# Altium PCB PCB1.PcbDoc
Units mm, origin at the board's own origin, x right, y up, seen from the top; angles counter-clockwise.
Board outline 40 x 28 mm, 2 copper layers (Top Layer, Bottom Layer); 60 components, 39 nets, 216 pads, 82 vias.
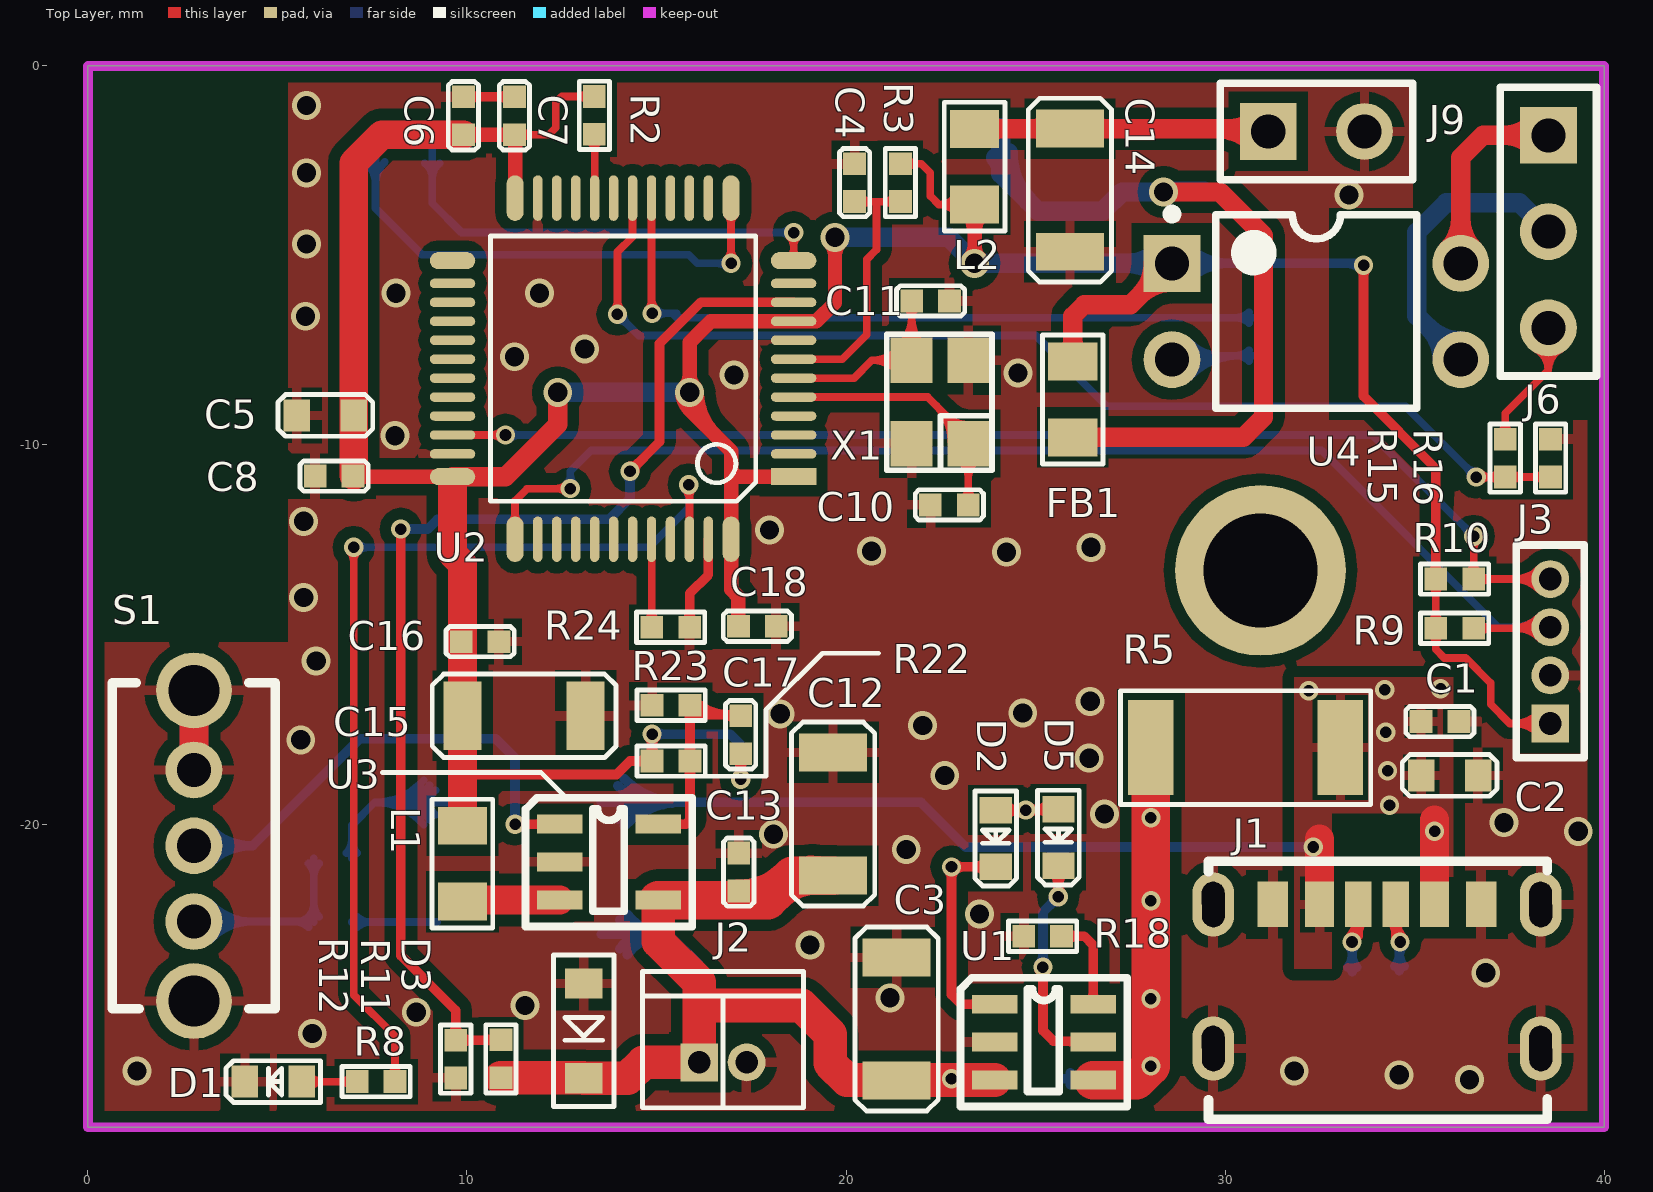
[diagram p0: Top Layer view]
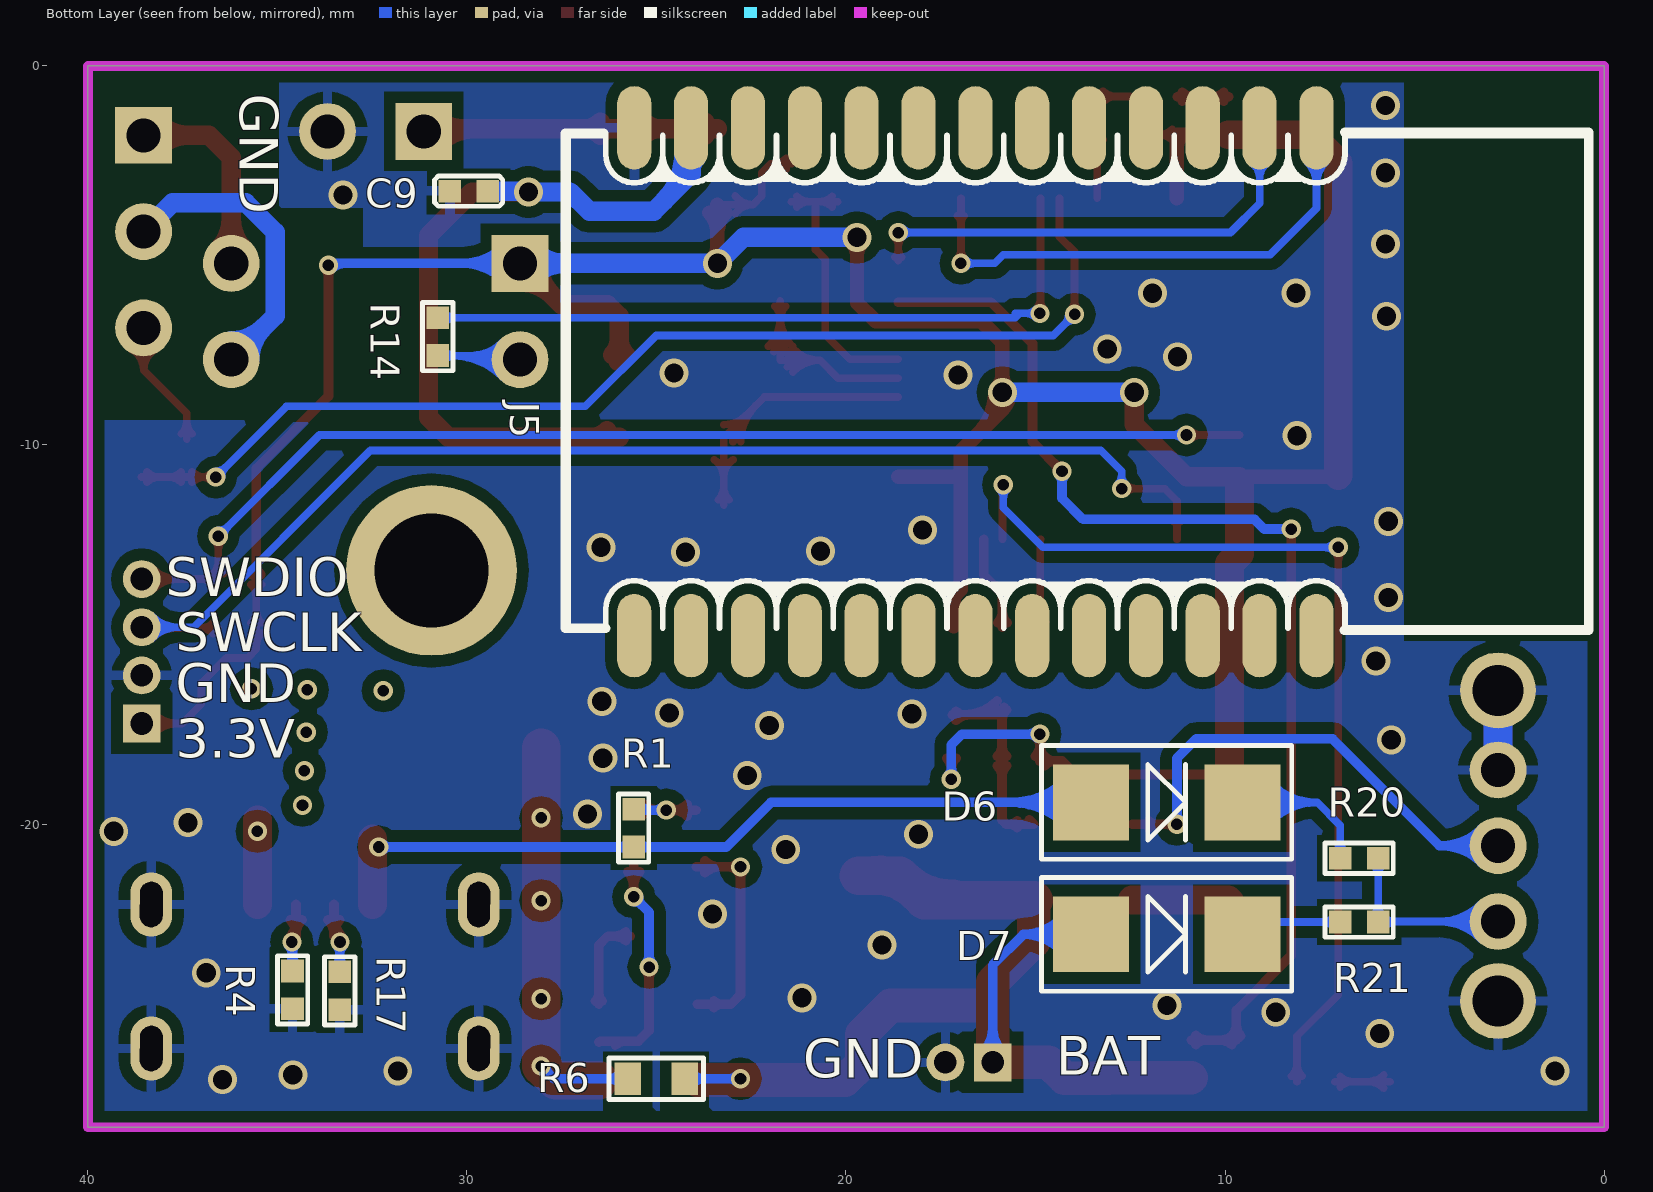
[diagram p1: Bottom Layer view, seen from below]

## Layer stack, top to bottom
Top Layer: signal copper 0.0356
Dielectric: dielectric 0.32, FR-4, Dk 4.8
Bottom Layer: signal copper 0.0356

## Board outline
0,-28 40,-28 40,0 0,0

## Design rules (kind name [scope] priority, off if disabled: settings)
Clearance [All] p1: gap=0.127
HoleSize [All] p1: absolutevalues=TRUE maxlimit=12.7 minlimit=0.025 maxpercent=80.000 minpercent=20.000
MinimumSolderMaskSliver [All] p1: minsoldermaskwidth=0.025
PolygonConnect gnd [IsVia] p1: connectstyle=Direct reliefconductorwidth=0.254 reliefentries=4 polygonreliefangle="90 Angle"
PolygonConnect [All] p2: connectstyle=Relief reliefconductorwidth=0.254 reliefentries=4 polygonreliefangle="90 Angle"
RoutingVias [All] p1: holewidth=0.711 width=1.27 viastyle="Through Hole" minholewidth=0.711 minwidth=1.27 maxholewidth=0.711 maxwidth=1.27
SilkToSilkClearance [All] p1: silktosilkclearance=0.025
SilkscreenOverComponentPads [All] p1: minsilkscreentomaskgap=0
SolderMaskExpansion [All] p1: expansion=0.102
Width [All] p1: maxlimit=5.08 minlimit=0.127 preferedwidth=0.254
24 further rules are at their usual default settings.

## Classes and differential pairs
component class power: C1 C2 C3 C12 C13 C14 C15 C16 C17 D2 D3 D5 D6 D7 J1 J2 J9 L1 L2 R1 R4 R5 R6 R17 R18 R20 R21 R22 R23 S1 S3 U1 U3
component class mcu: C4 C5 C6 C7 C8 C9 C10 C11 C18 D1 FB1 J3 J5 J6 R2 R3 R8 R9 R10 R11 R12 R14 R15 R16 R24 U2 U4 X1

## Components (designator, comment, footprint, x,y, rotation, side; value= is the part's Value field where it differs from the comment)
C1 "0.1uF/10V" 0402C 36.171,-17.297 r180 top
C2 "10uF/10V" 0603C 36.679,-18.72 r180 top
C3 "22uF/10V" 1206C 21.336,-26.772 r90 top
C4 "0.1uF/10V" 0402C 20.225,-2.578 r270 top
C5 "10uF/10V" 0603C 5.512,-9.22 r0 top
C6 "0.1uF/10V" 0402C 9.906,-0.813 r270 top
C7 "0.1uF/10V" 0402C 11.252,-0.813 r270 top
C8 "0.1uF/10V" 0402C 5.994,-10.82 r0 top
C9 "0.1uF/10V" 0402C 30.455,-3.302 r180 bottom
C10 "22P" 0402C 22.225,-11.582 r0 top
C11 "22P" 0402C 22.733,-6.198 r180 top
C12 "100uF/10v" 1206C 19.66,-21.361 r90 top
C13 "0.1uF/10V" 0402c 17.17,-21.768 r90 top
C14 "100uF/10v" 1206C 25.908,-1.651 r270 top
C15 "100uF/10V" 1206C 13.132,-17.145 r180 top
C16 "0.1uF/10V" 0402C 10.846,-15.189 r180 top
C17 "5pF/10V" 0402C 17.221,-17.145 r270 top
C18 "0.1uF/10V" 0402C 18.161,-14.783 r180 top
D1 "" 0603LED 5.639,-26.797 r180 top
D2 "" 0603LED 23.952,-19.633 r270 top
D3 "MM3Z5V1" SOD323 13.081,-24.206 r270 top
D5 "" 0603LED 25.603,-19.607 r270 top
D6 "SS14" SMA 13.538,-19.431 r180 bottom
D7 "SS14" SMA 13.538,-22.911 r180 bottom
FB1 "FB" 0805CZ 25.984,-7.798 r270 top
J1 "TYPE C_6P" TYPEC_6P 34.011,-22.123 r0 top
J2 "Header 2" 2X1.25MMZ 16.129,-26.289 r0 top
J3 "Header 4" mHDR1X4 38.583,-17.348 r90 top
J5 "HC-08" HC-08V20/22/41 16.586,-8.331 r180 bottom
J6 "Header 3" HDR1X3 38.532,-1.829 r270 top
J9 "Header 2" HDR1X2 31.14,-1.727 r0 top
L1 "4.7uH" 0805r 9.881,-22.047 r90 top
L2 "4.7uH" 0805r 23.393,-3.658 r90 top
R1 "1K" 0402R 25.603,-19.607 r270 bottom
R2 "100K" 0402R 13.36,-1.803 r90 top
R3 "10K" 0402R 21.438,-2.578 r270 top
R4 "5.1K" 0402R 34.601,-23.876 r270 bottom
R5 "0.4/3/4W" 2010R 33.045,-17.983 r180 top
R6 "5K" 0603R 24.257,-26.721 r0 bottom
R8 "1K" 0402R 8.103,-26.797 r180 top
R9 "10K" 0402R 35.56,-14.834 r0 top
R10 "10K" 0402R 35.56,-13.538 r0 top
R11 "10K/1%" 0402R 10.897,-26.695 r90 top
R12 "10K/1%" 0402R 9.703,-25.705 r270 top
R14 "120" 0402R 30.771,-6.641 r270 bottom
R15 "10K" 0402R 37.395,-10.846 r90 top
R16 "10K" 0402R 38.589,-9.846 r270 top
R17 "5.1K" 0402R 33.357,-23.901 r270 bottom
R18 "3K/1%" 0402R 24.689,-22.962 r0 top
R20 "10K" 0402R 6.96,-20.904 r180 bottom
R21 "10K" 0402R 6.96,-22.587 r180 bottom
R22 "24K/1%" 0402R 15.884,-18.339 r180 top
R23 "5.1K/1%" 0402R 14.884,-16.866 r0 top
R24 "100K" 0402R 15.875,-14.808 r180 top
S1 "SK-12D07-VG4" SK-12D07-VG4 2.794,-20.574 r270 top
U1 "TP4059" sot-23-6 25.222,-25.756 r0 top
U2 "STM32F103C8T6" TQFP-48 18.618,-10.236 r180 top
U3 "PAM2312" SOT-23-5 13.746,-21.006 r0 top
U4 "PC817B" DIP-4 32.41,-6.477 r0 top
X1 "8M" XTAL4TN_3225 22.479,-8.865 r90 top

## Footprints (in the part's own frame and the unit in brackets; to place one, negate y for a bottom-side part, rotate by r counter-clockwise, add the part's x,y. Pads: shape width x height; smd on the part's side, far side on the other; paste and mask are expansions set on the pad)
2X1.25MMZ [mm]
  rect 1x1 hole 0.6: 1(0,0)
  round 1 hole 0.6: 2(1.25,0)
  silkscreen extent -1.5,-1.2 2.75,2.4
0402C [mm]
  rect 0.6x0.6 smd: 1(0,0) 2(1,0)
  silkscreen extent -0.4,-0.4 1.4,0.4
0402c [mm]
  rect 0.6x0.6 smd: 1(0,0) 2(1,0)
  silkscreen extent -0.4,-0.4 1.4,0.4
0402R [mm]
  rect 0.6x0.6 smd: 1(0,0) 2(1,0)
  silkscreen extent -0.4,-0.4 1.4,0.4
0603C [mm]
  rect 0.7x0.85 smd: 1(0,0) 2(1.5,0)
  silkscreen extent -0.5,-0.55 2,0.55
0603LED [mm]
  rect 0.7x0.85 smd: 1(0,0) 2(1.5,0)
  silkscreen extent -0.5,-0.55 2,0.55
0603R [mm]
  rect 0.7x0.85 smd: 1(0,0) 2(1.5,0)
  silkscreen extent -0.5,-0.55 2,0.55
0805CZ [mm]
  rect 1x1.3 smd: 1(0,0) 2(2,0)
  silkscreen extent -0.7,-0.8 2.7,0.8
0805r [mm]
  rect 1x1.3 smd: 1(0,0) 2(2,0)
  silkscreen extent -0.7,-0.8 2.7,0.8
1206C [mm]
  rect 1x1.8 smd: 1(0,0) 2(3.25,0)
  silkscreen extent -0.8,-1.1 4.05,1.1
2010R [mm]
  rect 1.2x2.5 smd: 1(0,0) 2(5,0)
  silkscreen extent -0.8,-1.5 5.8,1.5
DIP-4 [mm] "DIP; 4 Leads; Row Spacing 7.62 mm; Pitch 2.54 mm"
  rect 1.5x1.5 hole 0.9: 1(-3.81,1.27)
  round 1.5 hole 0.9: 2(-3.81,-1.27) 3(3.81,-1.27) 4(3.81,1.27)
  silkscreen extent -3.93,-2.55 2.65,2.69, body extent -3.15,-2.5 3.15,2.5, height 5.6
HC-08V20/22/41 [mm]
  oval 0.9x2.2 smd: 1(9,6.7) 2(7.5,6.7) 3(6,6.7) 4(4.5,6.7) 5(3,6.7) 6(1.5,6.7) 7(0,6.7) 8(-1.5,6.7) 9(-3,6.7) 10(-4.5,6.7) 11(-6,6.7) 12(-7.5,6.7) 13(-9,6.7) 14(-9,-6.7) 15(-7.5,-6.7) 16(-6,-6.7) 17(-4.5,-6.7) 18(-3,-6.7) 19(-1.5,-6.7) 20(0,-6.7) 21(1.5,-6.7) 22(3,-6.7) 23(4.5,-6.7) 24(6,-6.7) 25(7.5,-6.7) 26(9,-6.7)
  silkscreen extent -10.82,-6.55 16.18,6.58
HDR1X2 [mm] "Connector; Header; 2 Position"
  rect 1.5x1.5 hole 0.9: 1(0,0)
  round 1.5 hole 0.9: 2(2.54,0)
  silkscreen extent -1.27,-1.27 3.81,1.27
HDR1X3 [mm] "Connector; Header; 3 Position"
  rect 1.5x1.5 hole 0.9: 1(0,0)
  round 1.5 hole 0.9: 2(2.54,0) 3(5.08,0)
  silkscreen extent -1.27,-1.27 6.35,1.27
mHDR1X4 [mm] "Connector; Header; 4 Position"
  rect 1x1 hole 0.6: 1(0,0)
  round 1 hole 0.6: 2(1.27,0) 3(2.54,0) 4(3.81,0)
  silkscreen extent -0.9,-0.9 4.71,0.9
SK-12D07-VG4 [mm]
  round 1.5 hole 0.9: 1(-2,0) 2(0,0) 3(2,0)
  round 2 hole 1.35: 4(-4.1,0) 5(4.1,0)
  silkscreen extent -4.3,-2.15 4.3,2.15
SMA [mm]
  rect 2x2 smd: 1(0,0) 2(4,0)
  silkscreen extent -1.3,-1.5 5.3,1.5
SOD323 [mm]
  rect 0.8x1 smd: 1(0,0) 2(2.5,0)
  silkscreen extent -0.75,-0.8 3.25,0.8
SOT-23-5 [mm]
  rect 1.2x0.5 smd: 1(-1.3,1) 2(-1.3,0) 3(-1.3,-1) 4(1.3,-1) 5(1.3,1)
  silkscreen extent -2.2,-1.7 2.2,1.7
sot-23-6 [mm]
  rect 1.2x0.5 smd: 1(-1.3,1) 2(-1.3,0) 3(-1.3,-1) 4(1.3,-1) 5(1.3,0) 6(1.3,1)
  silkscreen extent -2.2,-1.7 2.2,1.7
TQFP-48 [mm]
  rect 1.2x0.45 smd: 1(0,0.6)
  oval 1.2x0.25 smd: 2(0,0) 3(0,-0.5) 4(0,-1) 5(0,-1.5) 6(0,-2) 7(0,-2.5) 8(0,-3) 9(0,-3.5) 10(0,-4) 11(0,-4.5) 26(9,-4.5) 27(9,-4) 28(9,-3.5) 29(9,-3) 30(9,-2.5) 31(9,-2) 32(9,-1.5) 33(9,-1) 34(9,-0.5) 35(9,0)
  oval 1.2x0.45 smd: 12(0,-5.1) 25(9,-5.1) 36(9,0.6)
  oval 0.45x1.2 smd: 13(1.65,-6.75) 24(7.35,-6.75) 37(7.35,2.25) 48(1.65,2.25)
  oval 0.25x1.2 smd: 14(2.25,-6.75) 15(2.75,-6.75) 16(3.25,-6.75) 17(3.75,-6.75) 18(4.25,-6.75) 19(4.75,-6.75) 20(5.25,-6.75) 21(5.75,-6.75) 22(6.25,-6.75) 23(6.75,-6.75) 38(6.75,2.25) 39(6.25,2.25) 40(5.75,2.25) 41(5.25,2.25) 42(4.75,2.25) 43(4.25,2.25) 44(3.75,2.25) 45(3.25,2.25) 46(2.75,2.25) 47(2.25,2.25)
  silkscreen extent 1,-5.75 8,1.25
TYPEC_6P [mm]
  oval 1.1x1.7 hole 0.6 slot 1.2 at 90.6 deg: 1(-4.32,-3.8) 1(-4.32,0) 1(4.32,-3.8) 1(4.32,0)
  rect 0.7x1.2 smd: A5(-0.5,0) B5(0.5,0)
  rect 0.76x1.2 smd: A9(1.52,0) B9(-1.52,0)
  rect 0.8x1.2 smd: A12(2.75,0) B12(-2.75,0)
  silkscreen extent -4.44,-5.66 4.49,1.14
XTAL4TN_3225 [mm]
  rect 1.2x1.1 smd: 1(-1.1,-0.75) 2(1.1,-0.75) 3(1.1,0.75) 4(-1.1,0.75)
  silkscreen extent -1.8,-1.38 1.79,1.4

## Part data
C1 C2 C3 C4 C5 C6 C7 C8 C9 C10 C11 C12 C13 C14 C15 C16 C17 C18: library part Cap, "Capacitor"
D1 D2 D5: library part LED0, "Typical INFRARED GaAs LED"
D3: library part "D Tunnel1", "Tunnel Diode - RLC Model"
D6 D7: library part Diode, "Default Diode"
FB1: "BLM21PG331SN1D"
J2 J9: "Header, 2-Pin"
J3: "Header, 4-Pin"
J5: library part "Header 13X2", "Header, 13-Pin, Dual row"
J6: "Header, 3-Pin"
L1 L2: library part Inductor, "Inductor"
R1 R3 R4 R5 R6 R8 R9 R10 R11 R12 R14 R15 R16 R17 R18 R20 R21 R22 R23: library part "Res Semi", "Semiconductor Resistor"
R2 R24: library part Res1, "Resistor"
S1: library part SW-SPDT, "SPDT Subminiature Toggle Switch, Right Angle Mounting, Vertical Actuation"
U2: library part STM32F103C6
U4: library part Optoisolator1, "4-Pin Phototransistor Optocoupler"
X1: library part CRYSTAL-4

## Free pads (board coordinates)
  round 4.5 hole 3: 0(30.937,-13.31)

## Via types
v1: diameter 0.762, hole 0.508, Top Layer to Bottom Layer, tented both sides, 47 vias
v2: diameter 0.508, hole 0.305, Top Layer to Bottom Layer, tented both sides, 35 vias

## Nets (pads, with @x,y where several pads share a name; then routed paths per layer and width w, separated by ;. In a path a pad name is that pad's centre, name@x,y a point inside that pad or via, vN(x,y) a via of type N, cw(c..) or ccw(c..) an arc to the next point about the centre after c; other vN are vias at no path point)
AD_BAT_IN: R11.2 R12.1 U2.10 | length 33.1
  Top Layer w0.254: v2(8.255,-12.217) 8.255,-23.47 9.703,-24.917 R12.1 ; R12.1@9.58,-25.582 ccw(c9.285,-25.287) 9.703,-25.287 ccw(c10.12,-25.287) 9.825,-25.582 ccw(c10.12,-25.287) 10.12,-25.705 ccw(c10.12,-26.122) R12.1@9.825,-25.827 ; R12.1@9.601,-25.603 R12.1 ; 10.456,-25.705 ccw(c10.456,-25.255) R11.2@10.774,-25.573 ; 10.502,-25.705 cw(c10.502,-26.09) R11.2@10.774,-25.818 ; R11.2@10.887,-25.705 R12.1 ; v2(14.3,-10.693) 15.079,-9.914 15.079,-7.324 16.167,-6.236 U2.10 ; v2@14.3,-10.566 ccw(c14.3,-10.26) 14.517,-10.477 ccw(c14.734,-10.693) v2@14.427,-10.693
  Bottom Layer w0.254: v2(8.255,-12.217) 8.966,-12.217 9.22,-11.963 13.742,-11.963 14.3,-11.405 v2@14.3,-10.752 ; v2@14.21,-10.783 cw(c13.994,-11) 14.3,-11 cw(c14.607,-11) v2@14.39,-10.783
BATTERY: C3.1 C12.1 C13.1 D3.2 D7.1 J2.1 R6.1 R11.1 U1.3 U3.4 | length 42
  Top Layer w0.889: R11.1 D3.2@13.07,-26.695 ; D3.2 14.237,-26.706 14.654,-26.289 J2.1 16.129,-24.74 ; U3.4 15.046,-23.098 16.129,-24.181 16.129,-24.74 ; U1.3 20.025,-26.756 19.583,-26.314 19.583,-25.546 18.828,-24.79 16.18,-24.79 16.129,-24.74
  Top Layer w1.016: U3.4 17.069,-22.006 17.941,-22.006 18.585,-21.361 C12.1 ; C13.1@17.17,-21.976 ccw(c17.17,-20.044) 18.536,-21.41 ; 18.122,-21.825 cw(c19.26,-22.963) C12.1@19.26,-21.353 ; 18.248,-21.699 cw(c19.105,-22.556) C12.1@19.261,-21.353
  Bottom Layer w0.254: D7.1 15.316,-22.911 ; D7.1@14.028,-23.289 cw(c14.799,-23.885) 14.799,-22.911 cw(c14.799,-21.937) D7.1@14.028,-22.532 ; D7.1@14.229,-23.445 cw(c15.316,-24.285) 15.316,-22.911 ; D7.1@14.229,-22.377 ccw(c15.316,-21.537) 15.316,-22.911 ; J2.1@15.865,-26.025 ccw(c15.229,-25.389) 16.129,-25.389 ccw(c17.029,-25.389) J2.1@16.393,-26.025 ; J2.1 16.129,-23.724 15.316,-22.911 ; v2(22.784,-26.721) R6.1 ; v2@22.874,-26.811 cw(c23.09,-27.027) 23.09,-26.721 cw(c23.09,-26.414) v2@22.874,-26.631 ; R6.1@24.099,-26.878 ccw(c23.719,-27.259) 23.719,-26.721 ccw(c23.719,-26.182) R6.1@24.099,-26.563
DM: U2.32
DP: U2.33
GND: C1.1 C2.1 C3.2 C4.1 C5.1 C6.1 C7.1 C8.1 C9.1 C10.1 C11.1 C12.2 C13.2 C14.2 C15.1 C16.1 C18.1 D1.2 D3.1 J1.1 J1.A12 J1.B12 J2.2 J3.2 J5.13 J9.2 R4.2 R12.2 R16.1 R17.2 R18.1 R23.1 R24.1 S1.1 S1.4 S1.5 U1.2 U2.8 U2.23 U2.35 U2.47 U3.2 X1.2 X1.4 | length 10
  Top Layer w0.254: C6.1 C7.1 ; C6.1@10.028,-0.935 cw(c10.324,-1.23) 10.324,-0.813 cw(c10.324,-0.395) C6.1@10.028,-0.69 ; C7.1@11.13,-0.935 ccw(c10.835,-1.23) 10.835,-0.813 ccw(c10.835,-0.395) C7.1@11.13,-0.69 ; R24.1@15.753,-14.686 ccw(c15.457,-14.391) 15.875,-14.391 ccw(c16.293,-14.391) R24.1@15.997,-14.686 ; R24.1 15.875,-13.917 16.368,-13.424 U2.47
  Top Layer w0.762: S1.1 S1.4
  Bottom Layer w0.762: S1.1 S1.4
  other v1: 36.449,-26.746 34.595,-26.619 1.295,-26.518 31.826,-26.518 5.918,-25.527 8.661,-24.968 11.532,-24.79 21.158,-24.587 36.881,-23.927 19.05,-23.19 23.52,-22.377 21.59,-20.676 18.085,-20.269 39.319,-20.193 37.363,-19.964 26.822,-19.736 22.606,-18.72 26.416,-18.263 5.613,-17.78 22.022,-17.399 18.263,-17.094 24.663,-17.069 26.441,-16.764 6.02,-15.697 5.69,-14.021 24.232,-12.827 20.676,-12.802 26.467,-12.7 17.983,-12.243 5.69,-12.014 8.103,-9.754 17.043,-8.153 24.536,-8.103 11.252,-7.671 13.106,-7.468 5.74,-6.604 8.128,-5.994 11.913,-5.994 5.766,-4.699 33.274,-3.404 5.766,-2.819 5.766,-1.041
LED: D1.1 R8.2 | length 3.2
  Top Layer w0.203: D1.1 R8.2 ; D1.1@5.814,-26.973 cw(c6.238,-27.397) 6.238,-26.797 cw(c6.238,-26.197) D1.1@5.814,-26.621 ; R8.2@6.962,-26.937 ccw(c6.624,-27.276) 6.624,-26.797 ccw(c6.624,-26.318) R8.2@6.962,-26.657
NetC17_1: C17.1 R22.1 R23.2 U3.5 | length 9.8
  Top Layer w0.254: U3.5@15.164,-19.888 U3.5 15.778,-20.006 15.884,-19.899 R22.1 15.884,-17.12 C17.1@17.196,-17.12 ; U3.5@15.483,-20.093 cw(c15.693,-20.303) 15.693,-20.006 cw(c15.693,-19.709) U3.5@15.483,-19.919 ; R22.1@15.762,-18.461 cw(c15.467,-18.756) 15.884,-18.756 cw(c16.302,-18.756) R22.1@16.007,-18.461 ; R22.1@15.762,-18.216 ccw(c15.467,-17.921) 15.884,-17.921 ccw(c16.302,-17.921) R22.1@16.007,-18.216 ; R23.2@15.762,-16.988 cw(c15.467,-17.283) 15.884,-17.283 cw(c16.302,-17.283) R23.2@16.007,-16.988 ; R23.2@15.827,-16.923 ccw(c16.302,-16.448) 16.302,-17.12 ; R23.2@16.007,-16.743 ccw(c16.915,-15.835) 16.915,-17.12 ; 16.742,-17.12 cw(c16.742,-17.624) C17.1@17.099,-17.267 ; 16.865,-17.12 ccw(c16.865,-16.789) C17.1@17.099,-17.023
NetD2_1: D2.1 D5.1 R1.1 | length 6.2
  Top Layer w0.254: D2.1 D5.1@25.578,-19.633 ; D2.1@24.185,-19.79 cw(c24.566,-20.171) 24.566,-19.633 cw(c24.566,-19.094) D2.1@24.185,-19.475 ; v2@24.65,-19.723 ccw(c24.433,-19.939) 24.433,-19.633 ccw(c24.433,-19.326) v2@24.65,-19.543 ; v2@24.829,-19.723 cw(c25.046,-19.939) 25.046,-19.633 cw(c25.046,-19.326) v2@24.829,-19.543 ; v2@24.929,-19.633 ccw(c24.929,-19.008) D5.1@25.371,-19.45 ; 25.051,-19.633 cw(c25.051,-20.084) D5.1@25.371,-19.765
  Bottom Layer w0.254: v2@24.816,-19.633 25.578,-19.633 R1.1 ; v2@24.829,-19.723 cw(c25.046,-19.939) 25.046,-19.633 cw(c25.046,-19.326) v2@24.829,-19.543 ; 25.124,-19.633 ccw(c25.124,-19.128) R1.1@25.481,-19.485 ; 25.247,-19.633 cw(c25.247,-19.964) R1.1@25.481,-19.73
  other v2: 24.74,-19.633
NetD2_2: D2.2 U1.1 | length 8.1
  Top Layer w0.254: v2@22.694,-21.223 cw(c22.477,-21.439) 22.784,-21.439 cw(c23.09,-21.439) 22.874,-21.223 cw(c23.09,-21.439) 23.09,-21.133 cw(c23.09,-20.826) v2@22.874,-21.043 ; U1.1@23.485,-24.843 ccw(c23.275,-25.053) 23.275,-24.756 ccw(c23.275,-24.459) U1.1@23.485,-24.669 ; D2.2@23.72,-21.29 ccw(c23.339,-21.671) 23.339,-21.133 ccw(c23.339,-20.594) D2.2@23.72,-20.975 ; U1.1 23.038,-24.756 22.784,-24.501 v2(22.784,-21.133) D2.2
NetD5_2: D5.2 U1.5 | length 9
  Top Layer w0.254: v2@25.107,-23.864 cw(c24.89,-24.081) 25.197,-24.081 cw(c25.503,-24.081) v2@25.287,-23.864 ; v2(25.197,-23.774) 25.197,-25.451 25.476,-25.73 26.497,-25.73 U1.5 ; D5.2@25.446,-21.265 cw(c25.065,-21.646) 25.603,-21.646 cw(c26.142,-21.646) D5.2@25.761,-21.265 ; v2@25.513,-21.83 ccw(c25.297,-21.614) 25.603,-21.614 ccw(c25.91,-21.614) v2@25.693,-21.83 ; v2(25.603,-21.92) D5.2 ; 25.814,-25.73 cw(c25.814,-26.114) U1.5@26.085,-25.843
  Bottom Layer w0.254: v2@25.107,-23.685 ccw(c24.89,-23.468) 25.197,-23.468 ccw(c25.503,-23.468) v2@25.287,-23.685 ; v2(25.197,-23.774) 25.197,-22.327 v2(25.603,-21.92) ; v2@25.476,-21.92 cw(c25.17,-21.92) 25.386,-22.137 cw(c25.603,-22.354) v2@25.603,-22.047
NetD6_2: D6.2 R20.1 | length 11.2
  Bottom Layer w0.203: R20.1@6.819,-20.764 ccw(c6.481,-20.425) 6.96,-20.425 ccw(c7.439,-20.425) R20.1@7.1,-20.764 ; R20.1 6.96,-20.041 7.569,-19.431 ; D6.2@8.86,-20.02 ccw(c7.569,-21.139) 7.569,-19.431 ; D6.2@8.86,-18.842 cw(c7.569,-17.723) 7.569,-19.431 ; D6.2@9.013,-19.887 ccw(c8.015,-20.753) 8.015,-19.431 ccw(c8.015,-18.109) D6.2@9.013,-18.975 ; D6.2@9.167,-19.753 ccw(c8.46,-20.367) 8.46,-19.431 ccw(c8.46,-18.495) D6.2@9.167,-19.109 ; D6.2 7.569,-19.431
NetD7_2: D7.2 R21.1 | length 3
  Bottom Layer w0.203: R21.1 D7.2@9.214,-22.587 ; R21.1@7.1,-22.727 cw(c7.439,-23.066) 7.439,-22.587 cw(c7.439,-22.108) R21.1@7.1,-22.447
NetJ1_A5: J1.A5 R17.1 | length 4.5
  Top Layer w0.254: v2@33.26,-23.024 ccw(c32.656,-22.42) J1.A5@33.511,-22.42 ; v2(33.35,-23.114) 33.511,-22.954 J1.A5 ; J1.A5@33.353,-22.531 cw(c32.972,-22.912) 33.511,-22.912 cw(c34.049,-22.912) J1.A5@33.668,-22.531
  Bottom Layer w0.254: R17.1@33.234,-23.779 ccw(c32.939,-23.484) 33.357,-23.484 ccw(c33.774,-23.484) R17.1@33.479,-23.779 ; v2@33.26,-23.204 cw(c33.028,-23.436) 33.357,-23.436 ; R17.1 v2@33.357,-23.12 ; 33.357,-23.405 cw(c33.641,-23.405) v2@33.44,-23.204
NetJ1_B5: J1.B5 R4.1 | length 4.3
  Top Layer w0.254: J1.B5@34.353,-22.531 cw(c33.972,-22.912) 34.511,-22.912 cw(c35.049,-22.912) J1.B5@34.668,-22.531 ; J1.B5@34.511,-22.543 ccw(c35.191,-22.543) v2@34.71,-23.024 ; J1.B5 34.511,-23.004 v2(34.62,-23.114)
  Bottom Layer w0.254: R4.1@34.479,-23.754 ccw(c34.184,-23.458) 34.601,-23.458 ccw(c35.019,-23.458) R4.1@34.724,-23.754 ; v2@34.53,-23.204 cw(c34.359,-23.375) 34.601,-23.375 ; R4.1 v2@34.601,-23.133 ; 34.601,-23.466 cw(c34.973,-23.466) v2@34.71,-23.204
NetJ6_1: J6.1 U4.4 | length 9.1
  Top Layer w0.508: U4.4@35.87,-4.856 ccw(c35.023,-4.01) 36.22,-4.01 ccw(c37.418,-4.01) U4.4@36.571,-4.856 ; U4.4 36.22,-2.413 36.805,-1.829 J6.1 ; J6.1@38.181,-2.18 ccw(c37.334,-3.026) 37.334,-1.829 ccw(c37.334,-0.631) J6.1@38.181,-1.478
NetJ6_2: J6.2 U4.3 | length 10
  Top Layer w0.508: U4.3 U4.3@36.22,-7.621
  Bottom Layer w0.508: U4.3@35.724,-7.747 ccw(c34.527,-7.747) 35.374,-6.9 ccw(c36.22,-6.054) U4.3@36.22,-7.251 ; U4.3 35.06,-6.587 35.06,-4.386 35.839,-3.607 37.77,-3.607 J6.2
NetJ6_3: J6.3 R15.2 | length 6.4
  Top Layer w0.203: R15.2@37.255,-9.706 ccw(c36.916,-9.367) 37.395,-9.367 ccw(c37.874,-9.367) R15.2@37.535,-9.706 ; R15.2 37.395,-9.163 38.532,-8.026 ; J6.3@38.21,-7.472 cw(c37.893,-8.026) 38.532,-8.026 ; J6.3@38.311,-7.295 cw(c38.093,-7.676) 38.532,-7.676 cw(c38.97,-7.676) J6.3@38.753,-7.295 ; J6.3 38.532,-8.026 ; J6.3@38.854,-7.472 ccw(c39.171,-8.026) 38.532,-8.026
NetL1_1: L1.1 U3.3 | length 2.6
  Top Layer w0.762: L1.1 9.922,-22.006 U3.3
NetR2_1: R2.1 U2.20 | length 2.4
  Top Layer w0.203: R2.1@13.22,-1.944 cw(c12.863,-2.301) 13.368,-2.301 ; U2.20 R2.1@13.368,-1.811 ; 13.368,-2.264 cw(c13.821,-2.264) R2.1@13.501,-1.944
NetR5_2: R5.2 R6.2 U1.4 | length 13.8
  Top Layer w1.016: U1.4@26.522,-26.768 27.665,-26.768 v2(28.045,-26.387) R5.2
  Bottom Layer w0.254: R6.2 27.711,-26.721 v2(28.045,-26.387) ; R6.2@25.915,-26.878 cw(c26.295,-27.259) 26.295,-26.721 cw(c26.295,-26.182) R6.2@25.915,-26.563 ; v2@27.918,-26.387 cw(c27.612,-26.387) 27.829,-26.604 cw(c28.045,-26.82) v2@28.045,-26.514
  other v2: 28.045,-24.613 28.045,-22.022 28.045,-19.837
NetR8_1: R8.1 U2.46 | length 28.9
  Top Layer w0.203: v2@6.903,-12.808 cw(c6.642,-13.068) 7.01,-13.068 cw(c7.378,-13.068) v2@7.118,-12.808 ; v2(7.01,-12.7) 7.01,-24.511 8.103,-25.603 R8.1 ; R8.1@7.962,-26.657 ccw(c7.624,-26.318) 8.103,-26.318 ccw(c8.582,-26.318) R8.1@8.243,-26.657 ; v2@15.742,-11.157 cw(c15.437,-11.462) 15.868,-11.462 ; U2.46 v2@15.868,-11.068 ; 15.868,-11.372 cw(c16.173,-11.372) v2@15.957,-11.157
  Bottom Layer w0.203: v2(7.01,-12.7) 14.732,-12.7 14.808,-12.7 15.85,-11.659 v2(15.85,-11.049) ; v2@7.118,-12.808 cw(c7.378,-13.068) 7.378,-12.7 cw(c7.378,-12.332) v2@7.118,-12.592 ; v2@15.742,-11.157 cw(c15.482,-11.417) 15.85,-11.417 cw(c16.218,-11.417) v2@15.957,-11.157
NetR14_2: R14.2 U4.2 | length 7.7
  Bottom Layer w0.203: U4.2@28.706,-7.641 R14.2 ; U4.2@28.772,-7.918 cw(c29.44,-8.586) 29.44,-7.641 ; U4.2@28.915,-8.062 cw(c29.93,-9.077) 29.93,-7.641 ; U4.2@28.915,-7.432 ccw(c29.42,-6.927) 29.42,-7.641 ; U4.2@29.059,-8.205 cw(c30.421,-9.567) 30.421,-7.641 ; U4.2@29.059,-7.289 ccw(c29.911,-6.437) 29.911,-7.641 ; R14.2@30.631,-7.782 ccw(c30.292,-8.12) 30.292,-7.641 ccw(c30.292,-7.162) R14.2@30.631,-7.501
NetR18_2: R18.2 U1.6 | length 3.6
  Top Layer w0.254: R18.2 26.289,-22.962 26.522,-23.195 U1.6 ; R18.2@25.811,-23.084 cw(c26.106,-23.379) 26.106,-22.962 cw(c26.106,-22.544) R18.2@25.811,-22.839 ; U1.6@26.435,-24.669 ccw(c26.225,-24.459) 26.522,-24.459 ccw(c26.819,-24.459) U1.6@26.609,-24.669
NetR20_2: R20.2 R21.2 S1.3 | length 11.2
  Bottom Layer w0.203: S1.3 R21.2@5.947,-22.574 ; S1.3@3.109,-22.889 cw(c3.869,-23.649) 3.869,-22.574 cw(c3.869,-21.499) S1.3@3.109,-22.259 ; S1.3@3.252,-23.032 cw(c4.359,-24.139) 4.359,-22.574 cw(c4.359,-21.009) S1.3@3.252,-22.116 ; 5.449,-22.574 cw(c5.449,-23.097) R21.2@5.819,-22.727 ; 5.512,-22.574 ccw(c5.512,-22.139) 5.819,-22.447 ccw(c5.481,-22.108) 5.96,-22.108 ccw(c6.439,-22.108) R21.2@6.1,-22.447 ; R20.2@5.819,-21.044 cw(c5.481,-21.383) 5.96,-21.383 cw(c6.439,-21.383) R20.2@6.1,-21.044 ; R21.2 R20.2
NetR24_2: R24.2 U2.44 | length 3.1
  Top Layer w0.203: R24.2@14.735,-14.668 ccw(c14.396,-14.329) 14.875,-14.329 ccw(c15.354,-14.329) R24.2@15.015,-14.668 ; U2.44 14.875,-12.493 R24.2
NetS1_2: S1.2 U3.1 | length 18
  Top Layer w0.254: v2(11.268,-20.006) U3.1 ; v2@11.358,-20.096 cw(c11.575,-20.312) 11.575,-20.006 cw(c11.575,-19.699) v2@11.358,-19.916 ; U3.1@12.009,-20.093 ccw(c11.799,-20.303) 11.799,-20.006 ccw(c11.799,-19.709) U3.1@12.009,-19.919
  Bottom Layer w0.254: S1.2 4.343,-20.574 7.163,-17.755 10.76,-17.755 11.268,-18.263 v2(11.268,-20.006) ; S1.2@3.055,-20.835 cw(c3.685,-21.465) 3.685,-20.574 cw(c3.685,-19.683) S1.2@3.055,-20.313 ; S1.2@3.235,-21.015 cw(c4.298,-22.078) 4.298,-20.574 cw(c4.298,-19.07) S1.2@3.235,-20.133 ; v2@11.178,-19.916 ccw(c10.962,-19.699) 11.268,-19.699 ccw(c11.575,-19.699) v2@11.358,-19.916
NRST: C4.2 R3.2 U2.7 | length 8.5
  Top Layer w0.203: U2.7 19.899,-7.736 20.549,-7.087 20.549,-5.105 20.803,-4.851 20.803,-3.578 ; C4.2 20.803,-3.578 ; C4.2@20.365,-3.718 cw(c20.704,-4.057) 20.704,-3.578 cw(c20.704,-3.099) C4.2@20.365,-3.438 ; R3.2@21.297,-3.718 ccw(c20.959,-4.057) 20.959,-3.578 ccw(c20.959,-3.099) R3.2@21.297,-3.438 ; R3.2 20.803,-3.578
OSCIN: C10.2 U2.5 X1.1 | length 11.1
  Top Layer w0.203: U2.5 22.153,-8.736 23.229,-9.812 X1.1 23.229,-10.858 ; 22.391,-8.973 cw(c21.45,-9.915) X1.1@22.781,-9.915 ; 22.639,-9.222 ccw(c23.229,-8.632) X1.1@23.229,-9.466 ; 22.738,-9.32 cw(c22.143,-9.915) X1.1@22.984,-9.915 ; X1.1@22.978,-10.386 cw(c22.66,-10.858) 23.229,-10.858 ; C10.2@23.085,-11.442 ccw(c22.736,-11.094) 23.229,-11.094 ; C10.2@23.229,-11.582 23.229,-10.858 ; 23.229,-11.113 ccw(c23.694,-11.113) C10.2@23.365,-11.442 ; X1.1@23.48,-10.386 ccw(c23.798,-10.858) 23.229,-10.858
OSCOUT: C11.2 U2.6 X1.3 | length 10.8
  Top Layer w0.203: U2.6 20.212,-8.236 20.683,-7.765 ; X1.3@21.404,-8.074 ccw(c20.683,-8.759) 20.683,-7.765 ; X1.3@21.404,-7.456 cw(c20.683,-6.77) 20.683,-7.765 ; X1.3@21.412,-7.398 ccw(c20.637,-6.622) 21.733,-6.622 ; X1.3@21.551,-7.934 ccw(c21.157,-8.309) 21.157,-7.765 ccw(c21.157,-7.221) X1.3@21.551,-7.596 ; X1.3@21.556,-7.541 ccw(c21.127,-7.113) 21.733,-7.113 ; C11.2@21.593,-6.338 cw(c21.254,-6.677) 21.733,-6.677 cw(c22.212,-6.677) C11.2@21.873,-6.338 ; 21.733,-7.132 ccw(c22.311,-7.132) X1.3@21.902,-7.541 ; 21.733,-6.642 ccw(c22.802,-6.642) X1.3@22.046,-7.398 ; C11.2 21.733,-7.761 X1.3 20.683,-7.765
PEN_LED_IN: R15.1 R16.2 U2.18 | length 34.2
  Top Layer w0.203: v2@13.862,-6.445 ccw(c13.602,-6.185) 13.97,-6.185 ccw(c14.338,-6.185) v2@14.078,-6.445 ; v2(13.97,-6.553) 13.97,-4.902 14.368,-4.504 U2.18 ; v2(36.627,-10.846) R15.1 R16.2 ; v2@36.735,-10.954 cw(c36.995,-11.214) 36.995,-10.846 cw(c36.995,-10.478) v2@36.735,-10.738 ; R15.1@37.255,-10.986 ccw(c36.916,-11.325) 36.916,-10.846 ccw(c36.916,-10.367) R15.1@37.255,-10.706 ; R15.1@37.535,-10.986 cw(c37.874,-11.325) 37.874,-10.846 cw(c37.874,-10.367) R15.1@37.535,-10.706 ; R16.2@38.449,-10.986 ccw(c38.11,-11.325) 38.11,-10.846 ccw(c38.11,-10.367) R16.2@38.449,-10.706
  Bottom Layer w0.203: v2@13.97,-6.706 cw(c13.97,-7.074) 14.23,-6.813 cw(c14.49,-6.553) v2@14.122,-6.553 ; v2@13.995,-6.579 v2(13.97,-6.553) 14.529,-7.112 25.009,-7.112 26.877,-8.98 34.761,-8.98 v2(36.627,-10.846) ; v2@36.474,-10.846 ccw(c36.106,-10.846) 36.367,-10.586 ccw(c36.627,-10.325) v2@36.627,-10.693
PEN_SWITCH_OUT: R14.1 U2.17 | length 21
  Top Layer w0.203: v2@14.777,-6.42 ccw(c14.556,-6.199) 14.868,-6.199 ; v2@14.868,-6.512 U2.17 ; 14.868,-6.121 ccw(c15.291,-6.121) v2@14.992,-6.42
  Bottom Layer w0.203: v2(14.884,-6.528) 15.418,-6.528 ; v2@14.992,-6.636 cw(c15.252,-6.896) 15.252,-6.528 cw(c15.252,-6.16) v2@14.992,-6.42 ; 15.531,-6.528 15.418,-6.528 ; R14.1@30.631,-6.782 ccw(c30.292,-7.12) 30.292,-6.641 ccw(c30.292,-6.162) R14.1@30.631,-6.501 ; R14.1 16.408,-6.641 15.531,-6.641 15.418,-6.528
RXD2: J5.1 U2.13 | length 16.8
  Top Layer w0.203: v2@16.86,-5.098 ccw(c16.6,-4.838) 16.968,-4.838 ccw(c17.336,-4.838) v2@17.076,-5.098 ; U2.13@16.881,-3.948 cw(c16.67,-4.159) 16.968,-4.159 cw(c17.266,-4.159) U2.13@17.055,-3.948 ; v2(16.968,-5.206) U2.13
  Bottom Layer w0.203: J5.1@7.34,-2.528 cw(c6.745,-3.122) 7.586,-3.122 cw(c8.427,-3.122) J5.1@7.833,-2.528 ; J5.1 7.586,-3.751 8.814,-4.978 15.851,-4.978 16.078,-5.206 v2(16.968,-5.206) ; v2@16.86,-5.314 ccw(c16.6,-5.574) 16.6,-5.206 ccw(c16.6,-4.838) v2@16.86,-5.098
SWCLK: J3.3 R9.2 U2.37 | length 39
  Top Layer w0.203: U2.37@11.181,-12.024 ccw(c10.97,-11.813) 11.268,-11.813 ccw(c11.566,-11.813) U2.37@11.355,-12.024 ; U2.37 11.268,-11.468 11.585,-11.151 v2(12.725,-11.151) ; v2@12.618,-11.258 ccw(c12.357,-11.519) 12.357,-11.151 ccw(c12.357,-10.783) v2@12.618,-11.043 ; R9.2 38.557,-14.834 J3.3 ; R9.2@36.7,-14.974 cw(c37.039,-15.313) 37.039,-14.834 cw(c37.039,-14.355) R9.2@36.7,-14.693 ; 37.559,-14.834 ccw(c37.559,-13.785) J3.3@38.301,-14.526 ; 37.682,-14.834 cw(c37.682,-15.709) J3.3@38.301,-15.09 ; 38.05,-14.834 ccw(c38.05,-14.276) J3.3@38.445,-14.67
  Bottom Layer w0.203: v2@12.618,-11.043 ccw(c12.357,-10.783) 12.725,-10.783 ccw(c13.093,-10.783) v2@12.833,-11.043 ; v2(12.725,-11.151) 12.725,-10.693 13.276,-10.143 32.545,-10.143 37.211,-14.808 J3.3 ; J3.3@38.301,-15.09 ccw(c37.621,-15.77) 37.621,-14.808 ccw(c37.621,-13.846) J3.3@38.301,-14.526
SWDIO: J3.4 R10.2 U2.34 | length 36.5
  Top Layer w0.203: U2.34 v2(11.016,-9.736) ; v2@10.908,-9.844 ccw(c10.648,-10.104) 10.648,-9.736 ccw(c10.648,-9.368) v2@10.908,-9.628 ; R10.2@36.42,-13.398 ccw(c36.081,-13.059) 36.56,-13.059 ccw(c37.039,-13.059) 36.7,-13.398 ccw(c37.039,-13.059) 37.039,-13.538 ccw(c37.039,-14.017) R10.2@36.7,-13.678 ; v2@36.452,-12.512 cw(c36.192,-12.773) 36.56,-12.773 cw(c36.928,-12.773) v2@36.668,-12.512 ; v2(36.56,-12.405) R10.2 J3.4 ; J3.4@38.301,-13.82 ccw(c37.621,-14.5) 37.621,-13.538 ccw(c37.621,-12.576) J3.4@38.301,-13.256
  Bottom Layer w0.203: v2(11.016,-9.736) 33.892,-9.736 v2(36.56,-12.405) ; v2@11.123,-9.844 cw(c11.384,-10.104) 11.384,-9.736 cw(c11.384,-9.368) v2@11.123,-9.628 ; v2@36.408,-12.405 ccw(c36.04,-12.405) 36.3,-12.144 ccw(c36.56,-11.884) v2@36.56,-12.252
TXD2: J5.2 U2.12 | length 15.1
  Top Layer w0.203: v2@18.51,-4.502 cw(c18.25,-4.762) 18.618,-4.762 cw(c18.986,-4.762) v2@18.726,-4.502 ; U2.12@18.531,-5.049 ccw(c18.32,-4.838) 18.618,-4.838 ccw(c18.916,-4.838) U2.12@18.705,-5.049 ; U2.12 v2(18.618,-4.394)
  Bottom Layer w0.203: J5.2@8.888,-2.568 cw(c8.625,-2.946) 9.086,-2.946 ; J5.2 9.086,-2.946 ; J5.2@9.285,-2.568 ccw(c9.547,-2.946) 9.086,-2.946 ; v2@18.51,-4.502 ccw(c18.25,-4.762) 18.25,-4.394 ccw(c18.25,-4.026) v2@18.51,-4.286 ; v2(18.618,-4.394) 9.855,-4.394 9.086,-3.625 9.086,-2.946
VCC_3.3V: C5.2 C6.2 C7.2 C8.2 C15.2 C16.2 C17.2 C18.2 FB1.1 J3.1 L1.2 L2.1 R2.2 R3.1 R9.1 R10.1 R22.2 U2.1 U2.9 U2.24 U2.36 U2.48 U4.1 | length 128.8
  Top Layer w0.203: C7.2 12.157,-1.813 12.344,-1.626 12.344,-0.965 12.506,-0.803 R2.2 ; C7.2@11.392,-1.953 cw(c11.731,-2.292) 11.731,-1.813 cw(c11.731,-1.334) C7.2@11.392,-1.673 ; R2.2@13.22,-0.944 ccw(c12.881,-1.282) 12.881,-0.803 ccw(c12.881,-0.324) R2.2@13.22,-0.663 ; R3.1 21.984,-2.578 22.225,-2.819 22.225,-3.429 22.454,-3.658 ; R3.1@21.578,-2.718 cw(c21.917,-3.057) 21.917,-2.578 cw(c21.917,-2.099) R3.1@21.578,-2.438 ; L2.1@22.923,-3.894 ccw(c22.454,-4.241) 22.454,-3.658 ; L2.1@22.923,-3.421 cw(c22.454,-3.074) 22.454,-3.658 ; L2.1 22.454,-3.658 ; R9.1@35.42,-14.974 cw(c35.081,-15.313) 35.56,-15.313 cw(c36.039,-15.313) R9.1@35.7,-14.974 ; R9.1@35.42,-14.693 ccw(c35.081,-14.355) 35.56,-14.355 ccw(c36.039,-14.355) R9.1@35.7,-14.693 ; R10.1@35.42,-13.678 cw(c35.081,-14.017) 35.56,-14.017 cw(c36.039,-14.017) R10.1@35.7,-13.678 ; R10.1 R9.1 35.56,-15.392 35.789,-15.621 36.347,-15.621 37.008,-16.281 37.008,-16.84 37.516,-17.348 J3.1 ; J3.1@38.301,-17.63 ccw(c37.621,-18.31) 37.621,-17.348 ccw(c37.621,-16.386) J3.1@38.301,-17.066
  Top Layer w0.254: 9.881,-18.694 13.945,-18.694 14.3,-18.339 R22.2 v2@14.884,-17.755 ; R22.2@14.762,-18.461 ccw(c14.467,-18.756) 14.467,-18.339 ccw(c14.467,-17.921) 14.762,-18.216 ccw(c14.467,-17.921) 14.884,-17.921 ccw(c15.302,-17.921) R22.2@15.007,-18.216 ; v2@14.795,-17.717 cw(c14.578,-17.934) 14.884,-17.934 cw(c15.191,-17.934) v2@14.974,-17.717 ; C17.2@17.099,-18.267 cw(c16.804,-18.563) 17.221,-18.563 cw(c17.639,-18.563) C17.2@17.344,-18.267 ; v2@17.131,-18.732 ccw(c16.915,-18.515) 17.221,-18.515 ccw(c17.528,-18.515) v2@17.311,-18.732 ; v2(17.221,-18.821) C17.2 ; v2@33.565,-5.348 cw(c33.348,-5.564) 33.655,-5.564 cw(c33.962,-5.564) v2@33.745,-5.348 ; v2@33.655,-5.207 v2(33.655,-5.258) 33.655,-5.74 33.655,-8.712 35.56,-10.617 R10.1 ; R10.1@35.438,-13.416 ccw(c35.142,-13.121) 35.56,-13.121 ccw(c35.978,-13.121) R10.1@35.682,-13.416
  Top Layer w0.381: C8.2@7.045,-10.836 U2.36 ; C8.2@7.072,-10.743 ccw(c7.297,-10.518) 7.297,-10.836 ; C6.2 C7.2 11.268,-1.829 U2.24 ; C7.2@11.175,-1.89 cw(c10.949,-2.116) 11.268,-2.116 ; v1@15.684,-8.611 ccw(c16.328,-8.611) 15.873,-9.066 ; v1@15.74,-8.476 ccw(c15.415,-8.151) 15.875,-8.151 ccw(c16.335,-8.151) v1@16.01,-8.476 ; v1@16.066,-8.611 ccw(c17.629,-8.611) 16.523,-9.716 ; C18.2 17.161,-14.006 16.968,-13.813 U2.48 16.968,-10.685 ; U2.1 17.119,-10.836 16.968,-10.685 ; v1@19.576,-4.656 cw(c19.25,-4.981) 19.71,-4.981 cw(c20.17,-4.981) v1@19.845,-4.656 ; v1(19.71,-4.521) 19.71,-6.245 19.219,-6.736 U2.9 16.886,-6.736 16.429,-6.736 15.875,-7.29 15.875,-9.068 ; L2.1@23.175,-3.876 cw(c22.646,-4.405) 23.393,-4.405 cw(c24.141,-4.405) L2.1@23.612,-3.876 ; v1@23.259,-5.072 ccw(c22.933,-4.747) 23.393,-4.747 ccw(c23.853,-4.747) v1@23.528,-5.072 ; v1(23.393,-5.207) L2.1 ; 15.875,-9.068 cw(c16.328,-9.068) 16.009,-8.746 ccw(c16.328,-9.068) 15.875,-9.068 ; 15.875,-9.068 ccw(c15.422,-9.068) 15.741,-8.746 cw(c15.422,-9.068) 15.875,-9.068 ; 15.875,-9.068 16.968,-10.161 16.968,-10.685
  Top Layer w0.508: U2.36 11.016,-10.836 12.395,-9.457 v1(12.395,-8.611) ; FB1.1@25.81,-7.624 ccw(c25.39,-7.204) 25.984,-7.204 ccw(c26.578,-7.204) FB1.1@26.158,-7.624 ; FB1.1@26.01,-7.798 FB1.1 25.984,-6.604 26.289,-6.299 27.508,-6.299 U4.1 ; U4.1@28.104,-5.207 cw(c26.907,-5.207) 27.754,-6.054 cw(c28.6,-6.9) U4.1@28.6,-5.703
  Top Layer w0.762: C8.2@7.012,-10.803 C5.2 7.012,-2.556 7.755,-1.813 C6.2 ; U2.36@9.618,-10.996 9.618,-12.869 9.882,-13.133 9.882,-15.596 ; L1.2 9.881,-18.694 C15.2 C15.2 9.882,-15.596 ; C16.2@9.882,-15.225 9.882,-15.596
  Bottom Layer w0.254: v2(14.884,-17.628) 16.942,-17.628 17.221,-17.907 v2(17.221,-18.821) ; v2@14.974,-17.717 cw(c15.191,-17.934) 15.191,-17.628 cw(c15.191,-17.321) v2@14.974,-17.538 ; v2@17.131,-18.732 ccw(c16.915,-18.515) 17.221,-18.515 ccw(c17.528,-18.515) v2@17.311,-18.732 ; U4.1 v2@33.655,-5.207 ; U4.1@28.861,-5.468 cw(c29.491,-6.098) 29.491,-5.207 cw(c29.491,-4.316) U4.1@28.861,-4.946 ; U4.1@29.041,-5.648 cw(c30.104,-6.711) 30.104,-5.207 cw(c30.104,-3.703) U4.1@29.041,-4.766 ; 33.226,-5.207 cw(c33.226,-5.687) v2@33.565,-5.348
  Bottom Layer w0.508: v1(12.395,-8.611) v1(15.875,-8.611) ; v1(19.71,-4.521) 22.708,-4.521 v1(23.393,-5.207) U4.1 ; U4.1@28.25,-5.558 ccw(c27.403,-6.404) 27.403,-5.207 ccw(c27.403,-4.01) U4.1@28.25,-4.856
VCC_BT: C9.2 FB1.2 J5.12 | length 24.2
  Top Layer w0.508: FB1.2 30.487,-9.798 31.013,-9.271 31.013,-4.47 29.865,-3.322 v1(28.377,-3.322) ; FB1.2@26.308,-9.972 cw(c26.728,-10.392) 26.728,-9.798 cw(c26.728,-9.204) FB1.2@26.308,-9.624
  Bottom Layer w0.508: J5.12 24.086,-2.846 25.075,-3.835 26.766,-3.835 27.28,-3.322 v1(28.377,-3.322) ; J5.12@24.282,-2.285 ccw(c26.027,-2.319) 24.793,-3.553 ; v1@28.397,-3.302 C9.2 ; 24.086,-2.754 cw(c24.559,-2.754) 24.225,-2.42 ccw(c24.559,-2.754) 24.086,-2.754 ; 24.086,-2.754 ccw(c23.613,-2.754) 23.948,-2.42 cw(c23.613,-2.754) 24.086,-2.754
VOUT: C14.1 J9.1 L2.2 | length 12.5
  Top Layer w0.508: L2.2 31.071,-1.658 J9.1 ; L2.2@23.717,-1.832 cw(c24.137,-2.251) 24.137,-1.658 cw(c24.137,-1.064) L2.2@23.717,-1.484 ; 24.898,-1.658 ccw(c24.898,-1.041) C14.1@25.334,-1.477 ; 24.93,-1.658 cw(c24.93,-2.229) C14.1@25.334,-1.825 ; C14.1@26.482,-1.825 cw(c26.886,-2.229) 26.886,-1.658 ; C14.1@26.482,-1.477 ccw(c26.918,-1.041) 26.918,-1.658 ; 29.775,-1.658 cw(c29.775,-3.093) J9.1@30.79,-2.078 ; 30.111,-1.658 ccw(c30.111,-0.698) J9.1@30.79,-1.376
VUSB_5V: C1.2 C2.2 D6.1 J1.A9 J1.B9 R1.2 R5.1 | length 30.7
  Top Layer w0.762: J1.B9 32.491,-20.4 ; J1.A9 35.531,-19.888
  Bottom Layer w0.254: D6.1 17.196,-19.431 21.98,-19.431 23.156,-20.607 R1.2 v2(32.326,-20.607) ; D6.1@13.976,-19.869 cw(c15.033,-20.925) 15.033,-19.431 cw(c15.033,-17.937) D6.1@13.976,-18.993 ; D6.1@14.156,-20.048 cw(c15.646,-21.539) 15.646,-19.431 cw(c15.646,-17.323) D6.1@14.156,-18.814 ; R1.2@25.481,-20.73 ccw(c25.186,-21.025) 25.186,-20.607 ccw(c25.186,-20.19) R1.2@25.481,-20.485 ; R1.2@25.726,-20.73 cw(c26.021,-21.025) 26.021,-20.607 cw(c26.021,-20.19) R1.2@25.726,-20.485 ; v2@32.236,-20.697 ccw(c32.02,-20.914) 32.02,-20.607 ccw(c32.02,-20.301) v2@32.236,-20.518
  other v2: 35.531,-20.193 34.341,-19.507 34.29,-18.593 34.239,-17.577 32.207,-16.483 34.214,-16.459 35.687,-16.434
pads on no net: J5.3 J5.4 J5.5 J5.6 J5.7 J5.8 J5.9 J5.10 J5.11 J5.14 J5.15 J5.16 J5.17 J5.18 J5.19 J5.20 J5.21 J5.22 J5.23 J5.24 J5.25 J5.26 U2.2 U2.3 U2.4 U2.11 U2.14 U2.15 U2.16 U2.19 U2.21 U2.22 U2.25 U2.26 U2.27 U2.28 U2.29 U2.30 U2.31 U2.38 U2.39 U2.40 U2.41 U2.42 U2.43 U2.45

## Polygon pours and split planes (outlines as drawn)
GND on Top Layer "Top Layer-No Net" (solid, remove dead copper, pour order 1000): 34.976,0 34.95,-0.025 34.95,-3.607 34.95,-3.734 34.036,-3.734 32.741,-3.734 32.741,-5.055 32.741,-9.347 37.871,-9.347 40.437,-9.347 40.462,-9.373 40.31,-9.525 40.31,-30.378 -0.711,-30.378 -1.397,-29.693 -3.277,-27.813 -3.277,1.118 33.858,1.118 34.976,0
VUSB_5V on Top Layer "Top Layer-No Net" (solid, remove dead copper, pour order 1000): 32.203,-16.129 36.029,-16.129 36.029,-21.71 36.174,-21.861 36.347,-21.861 36.347,-24.003 35.391,-24.003 35.391,-19.749 35.362,-19.719 32.812,-19.719 32.812,-23.822 31.826,-23.822 31.826,-16.129 32.203,-16.129
GND on Bottom Layer "Top Layer-No Net" (solid, remove dead copper, pour order 1001): 34.976,0 34.95,-0.025 34.95,-3.607 34.95,-3.734 34.036,-3.734 32.741,-3.734 32.741,-5.055 32.741,-9.347 37.871,-9.347 40.437,-9.347 40.462,-9.373 40.31,-9.525 40.31,-30.378 -0.711,-30.378 -1.397,-29.693 -3.277,-27.813 -3.277,1.118 33.858,1.118 34.976,0

## Keep-outs
Keep-Out Layer:
  the board outline again, w0.254

## Other copper
Top Layer:
  pour cut-out: 5.283,0 5.283,-15.203 0,-15.203 0,0
Bottom Layer:
  pour cut-out: 5.283,0 5.283,-15.175 0,-15.175 0,0

## Silkscreen, mask and mechanical layers (free items; w line width, h text height)
Top Overlay:
  lines w0.127: 7.772,-18.644 11.962,-18.644 12.624,-19.306 ; 16.284,-18.739 17.888,-18.739 17.888,-16.986 17.977,-16.898 19.38,-15.494 20.853,-15.494
Bottom Overlay:
  text "GND" at 35.992,-0.737 h1.02 r90
  text "SWDIO" at 37.948,-13.995 h1.02
  text "SWCLK" at 37.683,-15.443 h1.02
  text "GND" at 37.683,-16.789 h1.02
  text "3.3V" at 37.683,-18.248 h1.02
  text "BAT" at 14.453,-26.619 h1.02
  text "GND" at 21.133,-26.695 h1.02
Mechanical 1:
  the board outline again, w0.254